# EAGLE board mainBoard_GTernal_1-1_v35 (EAGLE 9.7.0)
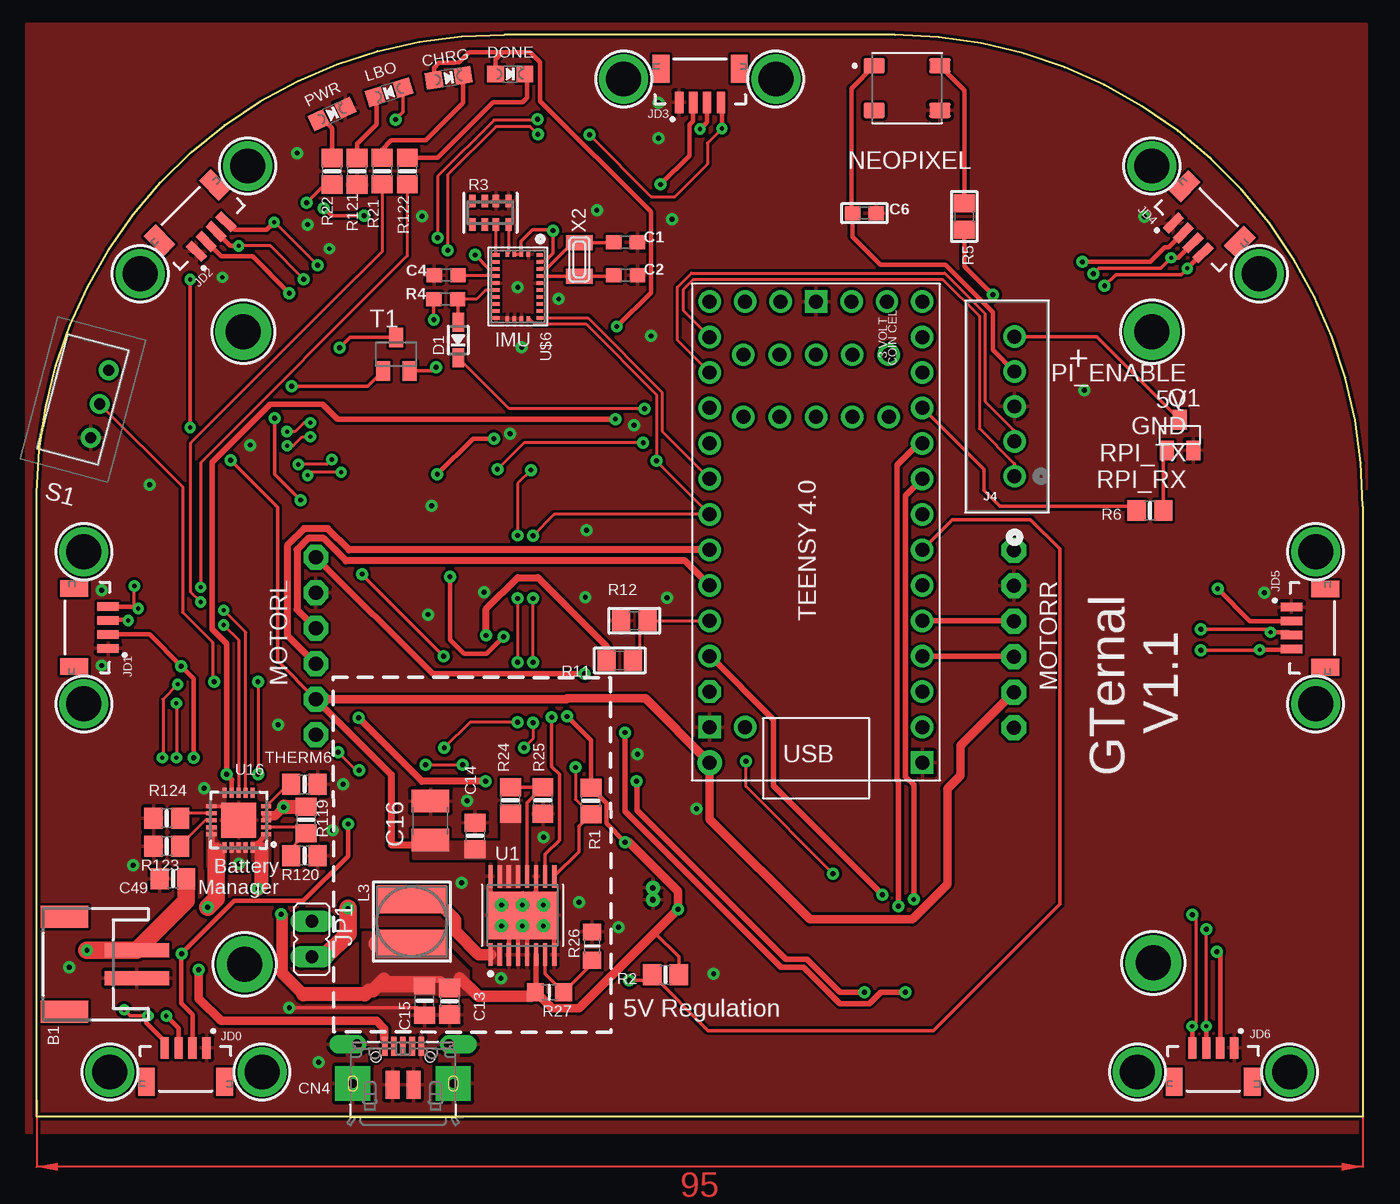
[diagram p0: board, top side]
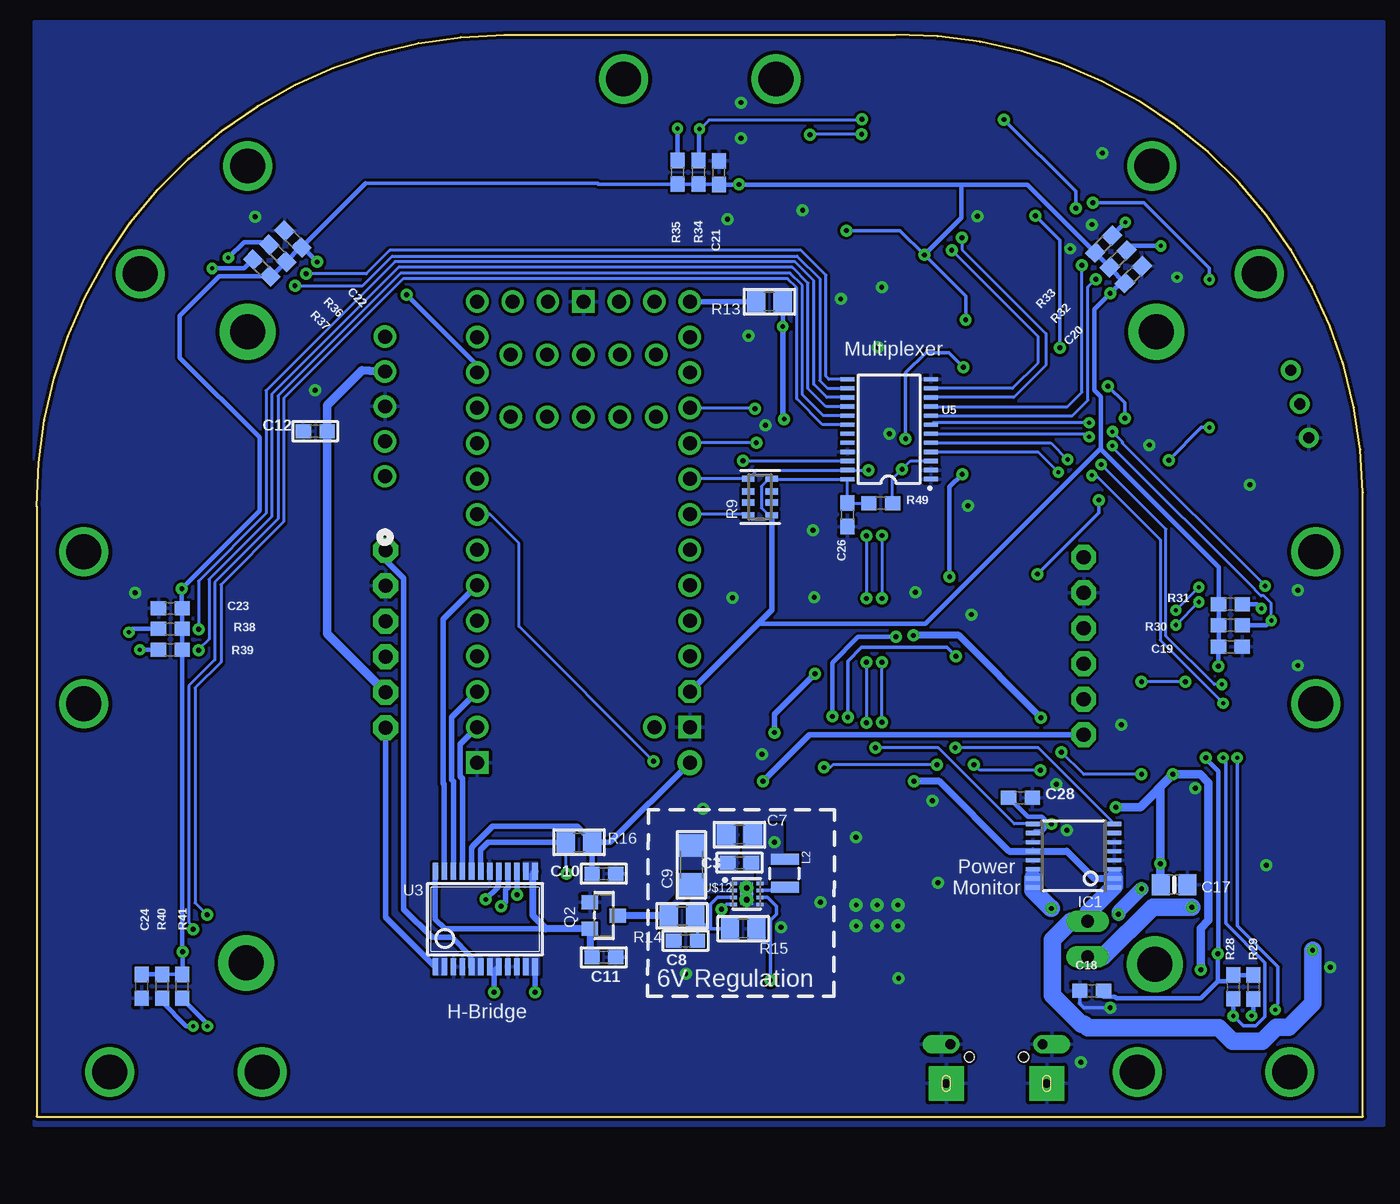
[diagram p1: board, bottom side, seen from below]

Size 95 x 77.46 mm. Coordinates in mm from the lower left corner, seen from the top.
Outline: 95,0 0,0 0,44.7 arc-90 33.5,77.46 61.5,77.46 arc-90 95,43.7 95,0
Copper layers (1*16): Top 0.035mm / dielectric 1.5mm / Bottom 0.035mm
Design rules "SparkFun *": minimum track width 8mil, minimum drill 0.3mm, track to track 8mil, track to pad 8mil, pad to pad 8mil, via to via 8mil, smd to smd 8mil, copper to edge 8mil, drill to drill 8mil, minimum pad ring 12mil, minimum via ring 10mil, stop-mask expansion 4mil, vias tented up to drill 20mil, thermal gap 10mil
Net classes: 1 highpower: width 0.406 mm, drill 0.483 mm

## Footprints (pad centres in the part's own frame; a part is rotated, then mirrored left to right if it is on the bottom)
JSTPH2 = smd 1 x 4.6: 1 -1,-3.7; 2 1,-3.7 | smd 1.6 x 3.4: NC1 -3.4,1.5; NC2 3.4,1.5
0603-NO = smd 1.1 x 1: 1 -0.85,0; 2 0.85,0
0603 = smd 1.1 x 1: 1 -0.85,0; 2 0.85,0
0805 = smd 1.3 x 1.5: 1 -0.95,0; 2 0.95,0
1206 = smd 1.6 x 1.8: 1 -1.4,0; 2 1.4,0
0805-NO = smd 1.3 x 1.5: 1 -0.95,0; 2 0.95,0
0805_10MGAP = smd 1.2 x 1.5: 1 -1.05,0; 2 1.05,0
C1210 = smd 1.6 x 2.7: 1 -1.4,0; 2 1.4,0
CHIPLED_0805_NOOUTLINE = smd 1.2 x 1.2: A 0,-1.05; C 0,1.05
4UCONN_20329 = smd 1 x 2: BASE@1 -0.75,-2; BASE@2 0.75,-2 | smd 0.4 x 1.35: D+ 0,0.775; D- -0.65,0.775; GND 1.3,0.775; ID 0.65,0.775; VBUS -1.3,0.775 | drill 0.7 offset: SPRT@1 -3.3,0.9; SPRT@2 3.3,0.9 | drill 0.6 pad 2.5 square: SPRT@3 -3.6,-1.9; SPRT@4 3.6,-1.9 | hole 0.7: -1.95,0; 1.95,0
SOD-323 = smd 1.35 x 0.8: A 1.27,0; C -1.27,0
TSSOP16 = smd 0.305 x 0.991: 1 -2.275,-2.918; 2 -1.625,-2.918; 3 -0.975,-2.918; 4 -0.325,-2.918; 5 0.325,-2.918; 6 0.975,-2.918; 7 1.625,-2.918; 8 2.275,-2.918; 9 2.275,2.918; 10 1.625,2.918; 11 0.975,2.918; 12 0.325,2.918; 13 -0.325,2.918; 14 -0.975,2.918; 15 -1.625,2.918; 16 -2.275,2.918
CONN_B5B-XH-A_JST = drill 0.991 pad 1.499: 1 0,0; 2 2.5,0; 3 5,0; 4 7.5,0; 5 10.001,0
JST04_1MM_VERT = smd 0.6 x 1.55: 1 -1.478,0.775; 2 -0.478,0.775; 3 0.522,0.775; 4 1.522,0.775 | smd 1.2 x 2: NC1 -2.778,3.2; NC2 2.822,3.2
JP1 = drill 0.914 long: 1 0,-1.27; 2 0,1.27
MURATA_DFE252012P-1R5M=P2 = smd 0.8 x 2: P$1 -1,0; P$2 1,0
INDUCTOR_5X5MM_TDK_VLC5045 = smd 2 x 5: P$1 -1.6,0; P$2 1.6,0
1X06-CLEANBIG = drill 1.016 pad 1.778 octagon: 1 -6.35,0; 2 -3.81,0; 3 -1.27,0; 4 1.27,0; 5 3.81,0; 6 6.35,0
SOL320P540X170-4N = smd 1.51 x 1.09: 1 -2.36,1.6; 2 -2.36,-1.6; 3 2.36,-1.6; 4 2.36,1.6
SOT23 = smd 1 x 1.4: 1 -0.95,-1.1; 2 0.95,-1.1; 3 0,1.1
SOT23-WIDE = smd 1 x 1.2: 1 -0.95,-1; 2 0.95,-1; 3 0,1
RESPACK_4X0603 = smd 0.45 x 0.9: 1 -1.3,-0.85; 2 -0.4,-0.85; 3 0.4,-0.85; 4 1.3,-0.85; 5 1.3,0.85; 6 0.4,0.85; 7 -0.4,0.85; 8 -1.3,0.85
_0805MP = smd 1.2 x 1.3: 1 -1.016,0; 2 1.016,0
MHSS1105 = drill 0.8 pad 1.3: 1 1.25,2.5; 2 1.25,0; 3 1.25,-2.5
SC59-BEC = smd 1 x 1.4: B -0.95,-1.2; C 0,1.2; E 0.95,-1.2
TEXAS_INSTRUMENTS_TPS61030PWP_0 = smd 0.3 x 1.6: 1 -2.275,-2.8; 2 -1.625,-2.8; 3 -0.975,-2.8; 4 -0.325,-2.8; 5 0.325,-2.8; 6 0.975,-2.8; 7 1.625,-2.8; 8 2.275,-2.8; 9 2.275,2.8; 10 1.625,2.8; 11 0.975,2.8; 12 0.325,2.8; 13 -0.325,2.8; 14 -0.975,2.8; 15 -1.625,2.8; 16 -2.275,2.8 | smd 5 x 3.4: 17 0,0 | drill 0.33 pad 0.63: PAD_1 -1.5,0.75; PAD_2 0,0.75; PAD_3 1.5,0.75; PAD_4 -1.5,-0.75; PAD_5 0,-0.75; PAD_6 1.5,-0.75
SSOP24 = smd 0.4 x 1.2: 1 -3.575,-3.42; 2 -2.925,-3.42; 3 -2.275,-3.42; 4 -1.625,-3.42; 5 -0.975,-3.42; 6 -0.325,-3.42; 7 0.325,-3.42; 8 0.975,-3.42; 9 1.625,-3.42; 10 2.275,-3.42; 11 2.925,-3.42; 12 3.575,-3.42; 13 3.575,3.42; 14 2.925,3.42; 15 2.275,3.42; 16 1.625,3.42; 17 0.975,3.42; 18 0.325,3.42; 19 -0.325,3.42; 20 -0.975,3.42; 21 -1.625,3.42; 22 -2.275,3.42; 23 -2.925,3.42; 24 -3.575,3.42
TSSOP28 = smd 1 x 0.3: 1 -3,3.57; 2 -3,2.925; 3 -3,2.275; 4 -3,1.625; 5 -3,0.975; 6 -3,0.325; 7 -3,-0.325; 8 -3,-0.975; 9 -3,-1.625; 10 -3,-2.275; 11 -3,-2.925; 12 -3,-3.575; 13 3,-3.575; 14 3,-2.925; 15 3,-2.275; 16 3,-1.625; 17 3,-0.975; 18 3,-0.325; 19 3,0.325; 20 3,0.975; 21 3,1.625; 22 3,2.275; 23 3,2.925; 24 3,3.575
QFN20_4MM = smd 0.73 x 0.28: P$1 -1.965,1; P$2 -1.965,0.5; P$3 -1.965,0; P$4 -1.965,-0.5; P$5 -1.965,-1; P$11 1.965,-1; P$12 1.965,-0.5; P$13 1.965,0; P$14 1.965,0.5; P$15 1.965,1 | smd 0.28 x 0.73: P$6 -1,-1.965; P$7 -0.5,-1.965; P$8 0,-1.965; P$9 0.5,-1.965; P$10 1,-1.965; P$16 1,1.965; P$17 0.5,1.965; P$18 0,1.965; P$19 -0.5,1.965; P$20 -1,1.965 | smd 2.5 x 2.5: P$21 0,0
BNO055 = smd 0.25 x 0.475: 1 -2.25,1.562; 6 -2.25,-1.562; 7 -1.75,-1.562; 8 -1.25,-1.562; 9 -0.75,-1.562; 10 -0.25,-1.562; 11 0.25,-1.562; 12 0.75,-1.562; 13 1.25,-1.562; 14 1.75,-1.562; 15 2.25,-1.562; 20 2.25,1.562; 21 1.75,1.562; 22 1.25,1.562; 23 0.75,1.562; 24 0.25,1.562; 25 -0.25,1.562; 26 -0.75,1.562; 27 -1.25,1.562; 28 -1.75,1.562 | smd 0.375 x 0.25: 2 -2.312,0.75; 3 -2.312,0.25; 4 -2.312,-0.25; 5 -2.312,-0.75; 16 2.312,-0.75; 17 2.312,-0.25; 18 2.312,0.25; 19 2.312,0.75
MOUNTINGHOLE_2.5_PLATED_THICK = drill 2.5 pad 4: P$1 0,0
MOUNTINGHOLE_2.5_PLATED = drill 2.5 pad 3.2: P$1 0,0
TPS61252 = smd 0.5 x 0.25: 1 -0.95,0.75; 2 -0.95,0.25; 3 -0.95,-0.25; 4 -0.95,-0.75; 5 0.95,-0.75; 6 0.95,-0.25; 7 0.95,0.25; 8 0.95,0.75 | drill 0.4 pad 0.457: P$2_GND 0,0.423; P$3_GND 0,-0.423 | smd 0.9 x 1.6: THERMAL_GND 0,0
TEENSY40 = drill 1: 0-RX1 -13.97,-7.62; 1-TX1 -11.43,-7.62; 2-OUT2 -8.89,-7.62; 3-LRCLK2 -6.35,-7.62; 3V3-2 16.51,-2.54; 4-BCLK2 -3.81,-7.62; 5-IN2 -1.27,-7.62; 6-OUT1D 1.27,-7.62; 7-RX2/OUT1A 3.81,-7.62; 8-TX2/IN1 6.35,-7.62; 9-OUT1C 8.89,-7.62; 10-CS/MQSR 11.43,-7.62; 11-MOSI/CTX1 13.97,-7.62; 12-MIO/MQSL 16.51,-7.62; 13-SCK/CRX1/LED 16.51,7.62; 14-A0/TX3/S-PFI_OUT 13.97,7.62; 15-A1/RX3/S-PDIF_IN 11.43,7.62; 16-A2/RX4/SCL1 8.89,7.62; 17-A3/TX4/SDA1 6.35,7.62; 18-A4/SDA0 3.81,7.62; 19-A5/SCL0 1.27,7.62; 20-A6/TX5/LRCLK1 -1.27,7.62; 21-A7/RX5/BCLK1 -3.81,7.62; 22-A8/CTX1 -6.35,7.62; 23-A9/CRX1/CCLK1 -8.89,7.62; 24-A10/TX6/SCL2 12.7,5.207; 25-A11/SDA2 8.255,5.207; 26-A12/MOSI1 12.7,2.603; 27-A13/SCK1 8.255,2.603; 28-RX7 12.7,0; 29-TX7 8.255,0; 30-CRX3 12.7,-2.603; 31-CTX3 8.255,-2.603; 32-OUTB1 12.7,-5.207; 33-MCLK2 8.255,-5.207; ON/OFF 16.51,5.08; PROGRAM 16.51,2.54; VBAT 16.51,-5.08; VUSB -13.97,5.08 | drill 1 octagon: 3V3-1 -11.43,7.62 | drill 1 square: GND1 -16.51,-7.62; GND2 16.51,0; GND3 -13.97,7.62 | drill 1 pad 1.778: VIN -16.51,7.62
XTAL3215 = smd 1.1 x 1.9: P$1 1.2,0; P$2 -1.2,0

## Placement (x,y rotation side)
B1  1.8-5V  [JSTPH2]  3.48,10.91 90 top
C1  22pF  [0603-NO]  42.19,62.61 180 top
C2  22pF  [0603-NO]  42.19,60.25 180 top
C3  10uF  [0603]  44.66,18.18 180 bottom
C4  0.1uF  [0603-NO]  29.33,60.26 0 top
C6  10uF  [0603]  59.3,64.7 0 top
C7  0.1uF  [0805]  44.66,20.18 180 bottom
C8  100pF  [0603]  48.51,12.59 0 bottom
C9  47uF  [1206]  48.1,18.02 90 bottom
C10  10uF  [0603]  54.37,17.39 0 bottom
C11  10uF  [0603]  54.37,11.39 0 bottom
C12  10uF  [0603]  75.05,49.08 0 bottom
C13  10uF  [0805-NO]  29.59,8.26 270 top
C14  2.2uF  [0805-NO]  31.41,20.1 90 top
C15  0.1uF  [0805_10MGAP]  27.78,8.3 270 top
C16  100uF  [C1210]  28.2,21.2 90 top
C17  10uF  [0805-NO]  13.52,16.61 0 bottom
C18  1.0uF  [0603]  19.42,9.01 180 bottom
C19  1.0uF  [0603]  9.49,33.64 0 bottom
C20  1.0uF  [0603]  16.44,60.29 45 bottom
C21  1.0uF  [0603]  46.13,67.59 90 bottom
C22  1.0uF  [0603]  76.63,62.84 135 bottom
C23  1.0uF  [0603]  85.43,36.39 180 bottom
C24  1.0uF  [0603]  87.49,9.32 270 bottom
C26  0.1uF  [0603]  36.92,43.09 270 bottom
C28  1uF  [0603-NO]  24.52,22.83 0 bottom
C49  10uF  [0805-NO]  9.77,17.04 180 top
CHRG  ORANGE  [CHIPLED_0805_NOOUTLINE]  29.51,74.39 279 top
CN4  microUSB_Charging_Coil_Input  [4UCONN_20329]  26.24,4.27 0 top
D1  1n4148  [SOD-323]  30.2,55.6 90 top
DONE  GREEN  [CHIPLED_0805_NOOUTLINE]  33.91,74.66 270 top
IC1  INA260  [TSSOP16]  20.72,18.68 90 bottom
J4  3A/250V  [CONN_B5B-XH-A_JST]  70.05,45.85 90 top
JD0  QWIIC_Vertical  [JST04_1MM_VERT]  10.69,5.69 180 top
JD1  QWIIC_Vertical  [JST04_1MM_VERT]  5.88,35 90 top
JD2  QWIIC_Vertical  [JST04_1MM_VERT]  13.03,62.46 45 top
JD3  QWIIC_Vertical  [JST04_1MM_VERT]  47.5,71.85 0 top
JD4  QWIIC_Vertical  [JST04_1MM_VERT]  81.93,62.39 315 top
JD5  QWIIC_Vertical  [JST04_1MM_VERT]  89.12,35 270 top
JD6  QWIIC_Vertical  [JST04_1MM_VERT]  84.31,5.69 180 top
JP1  [JP1]  19.71,12.71 180 top
L2  1.5uH  [MURATA_DFE252012P-1R5M=P2]  41.4,17.42 270 bottom
L3  6.8uH  [INDUCTOR_5X5MM_TDK_VLC5045]  26.88,13.96 90 top
LBO  RED  [CHIPLED_0805_NOOUTLINE]  25.25,73.35 108 top
MOTORL  [1X06-CLEANBIG]  20,33.7 90 top
MOTORR  [1X06-CLEANBIG]  70,34.2 90 top
NEOPIXEL  2758  [SOL320P540X170-4N]  62.35,73.65 0 top
PWR  BLUE  [CHIPLED_0805_NOOUTLINE]  21.16,71.8 295 top
Q1  MMBT2222A  [SOT23]  81.9,48.8 0 top
Q2  DMP2045U  [SOT23-WIDE]  54.37,14.39 270 bottom
R1  100K  [0805-NO]  39.7,22.6 270 top
R2  10K  [0805-NO]  45.05,10.15 180 top
R3  10K  [RESPACK_4X0603]  32.5,64.73 0 top
R4  10K  [0603-NO]  29.3,58.54 0 top
R5  300-500  [0805]  66.45,64.45 270 top
R6  100  [0805-NO]  79.75,43.4 180 top
R9  10K  [RESPACK_4X0603]  43.18,44.37 90 bottom
R11  5K  [0805]  41.77,32.66 180 top
R12  15K  [0805]  42.81,35.5 0 top
R13  5k  [0805]  42.51,58.35 180 bottom
R14  787K  [0805]  48.77,14.37 0 bottom
R15  196K  [0805]  44.39,13.45 0 bottom
R16  10k  [0805]  56.15,19.64 0 bottom
R21  1K  [0805-NO]  24.75,67.71 90 top
R22  1K  [0805-NO]  21.15,67.69 90 top
R24  1.87M  [0805-NO]  33.93,22.64 270 top
R25  200K  [0805-NO]  36.26,22.64 90 top
R26  340K  [_0805MP]  39.79,12.2 270 top
R27  1.87M  [_0805MP]  36.73,8.9 180 top
R28  4.7k  [0603]  9.29,9.28 270 bottom
R29  4.7k  [0603]  7.83,9.28 270 bottom
R30  4.7k  [0603]  9.48,35.17 0 bottom
R31  4.7k  [0603]  9.48,36.67 0 bottom
R32  4.7k  [0603]  17.53,61.42 45 bottom
R33  4.7k  [0603]  18.57,62.48 45 bottom
R34  4.7k  [0603]  47.59,67.63 90 bottom
R35  4.7k  [0603]  49.09,67.62 90 bottom
R36  4.7k  [0603]  77.73,61.82 135 bottom
R37  4.7k  [0603]  78.88,60.77 135 bottom
R38  4.7k  [0603]  85.43,34.92 180 bottom
R39  4.7k  [0603]  85.43,33.42 180 bottom
R40  4.7k  [0603]  86.03,9.32 270 bottom
R41  4.7k  [0603]  84.58,9.32 270 bottom
R49  10k  [0603]  34.53,43.93 180 bottom
R119  270K  [0805-NO]  19.3,21.24 90 top
R120  100K  [0805-NO]  19.18,18.69 0 top
R121  1K  [0805-NO]  22.95,67.69 90 top
R122  1K  [0805-NO]  26.55,67.7 90 top
R123  1.0K  [0805-NO]  9.32,19.36 0 top
R124  100K  [0805-NO]  9.32,21.37 0 top
S1  MHSS1105  [MHSS1105]  3.3,51.35 345 top
T1  MMUN2133LT1G  [SC59-BEC]  25.75,54.6 0 top
THERM6  15K  [0805-NO]  19.18,23.79 180 top
U1  TEXAS_INSTRUMENTS_TPS61030PWPTEXAS_INSTRUMENTS_TPS61030PWP_0_0  [TEXAS_INSTRUMENTS_TPS61030PWP_0]  34.8,14.4 0 top
U3  TB6612 SSOP  [SSOP24]  62.87,14.14 0 bottom
U5  PCA9548A  [TSSOP28]  33.93,49.22 180 bottom
U16  MCP73871  [QFN20_4MM]  14.48,21.23 180 top
U$6  BNO055  [BNO055]  34.47,59.44 270 top
U$7  [MOUNTINGHOLE_2.5_PLATED_THICK]  14.8,56.2 0 top
U$8  MOUNTINGHOLE2.5  [MOUNTINGHOLE_2.5_PLATED]  42.05,74.3 0 top
U$12  TPS61252SMD  [TPS61252]  44.14,15.95 0 bottom
U$23  [MOUNTINGHOLE_2.5_PLATED_THICK]  79.9,56.2 0 top
U$28  [MOUNTINGHOLE_2.5_PLATED_THICK]  14.9,10.9 0 top
U$29  [MOUNTINGHOLE_2.5_PLATED_THICK]  80,11 0 top
U$30  MOUNTINGHOLE2.5  [MOUNTINGHOLE_2.5_PLATED]  52.95,74.3 0 top
U$31  MOUNTINGHOLE2.5  [MOUNTINGHOLE_2.5_PLATED]  7.41,60.36 0 top
U$32  MOUNTINGHOLE2.5  [MOUNTINGHOLE_2.5_PLATED]  15.11,68.07 0 top
U$33  MOUNTINGHOLE2.5  [MOUNTINGHOLE_2.5_PLATED]  3.38,29.55 0 top
U$34  MOUNTINGHOLE2.5  [MOUNTINGHOLE_2.5_PLATED]  3.38,40.45 0 top
U$35  MOUNTINGHOLE2.5  [MOUNTINGHOLE_2.5_PLATED]  5.24,3.19 0 top
U$36  MOUNTINGHOLE2.5  [MOUNTINGHOLE_2.5_PLATED]  16.14,3.19 0 top
U$37  MOUNTINGHOLE2.5  [MOUNTINGHOLE_2.5_PLATED]  79.89,68.07 0 top
U$43  MOUNTINGHOLE2.5  [MOUNTINGHOLE_2.5_PLATED]  87.59,60.36 0 top
U$45  MOUNTINGHOLE2.5  [MOUNTINGHOLE_2.5_PLATED]  91.62,40.45 0 top
U$46  MOUNTINGHOLE2.5  [MOUNTINGHOLE_2.5_PLATED]  91.62,29.55 0 top
U$47  MOUNTINGHOLE2.5  [MOUNTINGHOLE_2.5_PLATED]  78.86,3.19 0 top
U$48  MOUNTINGHOLE2.5  [MOUNTINGHOLE_2.5_PLATED]  89.76,3.19 0 top
U$57  TEENSY40  [TEENSY40]  55.83,41.85 90 top
X2  32.768  [XTAL3215]  38.87,61.37 270 top

## Library data of the parts
B1 C1-C4 C6-C15 C17 C28 C49 CHRG CN4 D1 DONE IC1 L3 LBO PWR Q2 R1-R6 R9 R11-R16 R21 R22 R24-R27 R119-R124 THERM6 U3 U16 U$6 U$7 U$23 U$28 U$29 = microbuilder
C16 = rcl
C18-C24 = SparkFun-Capacitors; PROD_ID: CAP-00868
C26 = SparkFun-Capacitors; PROD_ID: CAP-00810
J4 = 2023-10-05_21-35-32_Library; COPYRIGHT: Copyright (C) 2023 Ultra Librarian. All rights reserved.; MANUFACTURER_PART_NUMBER: B5B-XH-A; MFR_NAME: JST
JD0 JD1-JD6 = SparkFun-Connectors; PROD_ID: CONN-14483
JP1 = jumper
L2 = gritsbotx_electronics
MOTORL MOTORR = adafruit
NEOPIXEL = 2758; AVAILABILITY: In Stock; CHECK_PRICES: https://www.snapeda.com/parts/2758/Adafruit+Industries+LLC/view-part/?ref=eda; DESCRIPTION: Addressable Lighting Neopixel 10 LED Discrete Serial (Shift Register) Red, Green, Blue, Neutral White (RGBW) 5.00mm L x 5.00mm W; MF: Adafruit Industries; MP: 2758; PACKAGE: SMD-4 Adafruit Industries; PRICE: None; SNAPEDA_LINK: https://www.snapeda.com/parts/2758/Adafruit+Industries+LLC/view-part/?ref=snap
Q1 = MMBT2222A; AVAILABILITY: In Stock; CHECK_PRICES: https://www.snapeda.com/parts/MMBT2222A/Diotec/view-part/?ref=eda; DESCRIPTION: Bipolar (BJT) Transistor NPN 40 V 600 mA 250MHz 250 mW Surface Mount SOT-23-3 (TO-236); MF: Diotec Semiconductor; MP: MMBT2222A; PACKAGE: SOT-23-3 Diotec; PRICE: None; SNAPEDA_LINK: https://www.snapeda.com/parts/MMBT2222A/Diotec/view-part/?ref=snap
R28-R41 = SparkFun-Resistors; PROD_ID: RES-07857
R49 = SparkFun-Resistors; PROD_ID: RES-00824
S1 = MHSS1105; DESCRIPTION: APEM - MHSS1105 - SLIDE SWITCH, SPDT, 0.3A, 6VDC, TH; HEIGHT: 4mm; MANUFACTURER_NAME: Apem; MANUFACTURER_PART_NUMBER: MHSS1105; MOUSER_PART_NUMBER: 642-MHSS1105; MOUSER_PRICE-STOCK: https://www.mouser.co.uk/ProductDetail/Apem/MHSS1105?qs=pNV45xh2Ia0pDJDMcFqmnQ%3D%3D
T1 = Transistor
U1 = Texas Instruments - TPS61030PWP; CENTROID_NOT_SPECIFIED: No; CURRENT_-_OUTPUT: 3.6A (Switch); DATASHEET: http://www.ti.com/lit/gpn/tps61030; DIGIKEY_DESCRIPTION: IC Boost Switching Regulator IC Positive Adjustable 1.8V 1 Output 3.6A (Switch) 16-TSSOP (0.173", 4.40mm Width) Exposed Pad; DIGIKEY_PART_NUMBER: 296-27006-5-ND; FREQUENCY_-_SWITCHING: 600kHz; FUNCTION: Step-Up; LEAD_FREE: yes; MF: Texas Instruments; MFG_PACKAGE_IDENT: PWP (R-PDSO-G16); MOUSER_PART_NUMBER: 595-TPS61030PWP; MPN: TPS61030PWP; OUTPUT_TYPE: Adjustable; PACKAGE: HTSSOP16; PREFIX: U; ROHS: yes; TEMPERATURE_RANGE_HIGH: +85°C; TEMPERATURE_RANGE_LOW: -40°C; VOLTAGE_-_INPUT_(MAX): 5.5V; VOLTAGE_-_INPUT_(MIN): 1.8V; VOLTAGE_-_OUTPUT_(MAX): 5.5V; VOLTAGE_-_OUTPUT_(MIN/FIXED): 1.8V
U5 = SparkFun-IC-Logic; PROD_ID: IC-13948
U$8 U$30-U$37 U$43 U$45-U$48 = microbuilder; BOM: EXCLUDE
U$12 = Gritsbot_Library
U$57 = teensy
X2 = adafruit2

## Nets
3.3V: C18.1 C19.1 C20.1 C21.1 C22.1 C23.1 C24.1 C26.1 C28.1 IC1.10 JD0.2 JD1.2 JD2.2 JD3.2 JD4.2 JD5.2 JD6.2 R4.1 R9.1 R9.4 R28.1 R29.1 R30.1 R31.1 R32.1 R33.1 R34.1 R35.1 R36.1 R37.1 R38.1 R39.1 R40.1 R41.1 R49.2 U5.24 U$6.3 U$6.4 U$6.8 U$6.28 U$57.3V3-1
5.0V: C6.1 C10.1 C12.2 C14.1 C16.1 J4.4 MOTORL.2 MOTORR.2 NEOPIXEL.1 R16.2 R22.1 R24.2 U1.13 U1.14 U1.15 U3.20 U$57.VIN
6.0V: C8.1 C9.1 Q2.3 R14.1 U$12.2
ALERT: IC1.7
CHG_5V: R13.2 U$57.13-SCK/CRX1/LED
ENABLE: R1.2 S1.2 U1.9
ENCAL: MOTORL.3 U$57.20-A6/TX5/LRCLK1
ENCAR: MOTORR.3 U$57.2-OUT2
ENCBL: MOTORL.4 U$57.21-A7/RX5/BCLK1
ENCBR: MOTORR.4 U$57.3-LRCLK2
GND: B1.1 C1.1 C2.1 C3.2 C4.1 C6.2 C7.2 C9.2 C10.2 C11.2 C12.1 C13.2 C14.2 C15.2 C16.2 C17.2 C18.2 C19.2 C20.2 C21.2 C22.2 C23.2 C24.2 C26.2 C28.2 C49.2 CN4.BASE@1 CN4.BASE@2 CN4.GND CN4.SPRT@1 CN4.SPRT@2 CN4.SPRT@3 CN4.SPRT@4 IC1.4 IC1.5 IC1.6 IC1.11 IC1.13 J4.3 JD0.1 JD1.1 JD2.1 JD3.1 JD4.1 JD5.1 JD6.1 MOTORL.5 MOTORR.5 NEOPIXEL.3 PWR.C Q1.2 Q2.1 R3.5 R3.6 R12.1 R15.2 R25.1 R26.1 R120.2 R121.1 R123.1 R124.1 S1.3 THERM6.1 U1.3 U1.4 U1.5 U1.8 U1.11 U1.16 U1.17 U1.PAD_1 U1.PAD_2 U1.PAD_3 U1.PAD_4 U1.PAD_5 U1.PAD_6 U3.3 U3.4 U3.9 U3.10 U3.18 U5.1 U5.2 U5.12 U5.21 U16.P$10 U16.P$11 U16.P$21 U$6.2 U$6.10 U$6.15 U$6.16 U$6.17 U$6.18 U$6.25 U$12.1 U$12.5 U$12.P$2_GND U$12.P$3_GND U$12.THERMAL_GND U$57.GND1 U$57.GND2 U$57.GND3
I2CMUX_!RST: R49.1 U5.3 U$57.17-A3/TX4/SDA1
IMU_NRESET_3V: D1.A R4.2 U$6.11
IMU_RESET: D1.C U$57.16-A2/RX4/SCL1
INT_3V: U$6.14
LMIN1: U3.17 U$57.7-RX2/OUT1A
LMIN2: U3.16 U$57.8-TX2/IN1
LMOUT+: MOTORL.1 U3.11 U3.12
LMOUT-: MOTORL.6 U3.7 U3.8
MOT_EN: R2.2 U$12.6 U$57.5-IN2
N$1: R24.1 R25.2 U1.12
N$2: LBO.A T1.C
N$3: C1.2 U$6.27 X2.P$2
N$4: C2.2 U$6.26 X2.P$1
N$5: C4.2 U$6.9
N$6: T1.B U1.10
N$7: Q1.1 R6.1
N$8: CHRG.C R21.2
N$10: J4.5 Q1.3
N$11: L2.P$2 U$12.7
N$12: C8.2 R14.2 R15.1 U$12.3
N$13: L3.P$2 U1.1 U1.2
N$14: R26.2 R27.1 U1.7
N$18: NEOPIXEL.4 R5.1
N$19: PWR.A R22.2
N$100: R119.1 R120.1 U16.P$2
N$101: R122.1 U16.P$7
N$102: R21.1 U16.P$8
N$103: R123.2 U16.P$13
N$104: THERM6.2 U16.P$5
N$105: DONE.C R122.2
N$106: LBO.C R121.2
N$107: R124.2 U16.P$12
NEOPIXEL: R5.2 U$57.10-CS/MQSR
PI_START: R6.2 U$57.9-OUT1C
PS0_3V: R3.3 U$6.6
PS1_3V: R3.4 U$6.5
PWML: U3.15 U$57.23-A9/CRX1/CCLK1
PWMR: U3.23 U$57.4-BCLK2
RMIN1: U3.21 U$57.0-RX1
RMIN2: U3.22 U$57.1-TX1
RMOUT+: MOTORR.1 U3.1 U3.2
RMOUT-: MOTORR.6 U3.5 U3.6
RPI_RX: J4.1 U$57.14-A0/TX3/S-PFI_OUT
RPI_TX: J4.2 U$57.15-A1/RX3/S-PDIF_IN
SCL0: JD0.4 R29.2 U5.5
SCL1: JD1.4 R31.2 U5.7
SCL2: JD2.4 R33.2 U5.9
SCL3: JD3.4 R35.2 U5.11
SCL4: JD4.4 R37.2 U5.14
SCL5: JD5.4 R39.2 U5.16
SCL6: JD6.4 R41.2 U5.18
SCL_MAIN: IC1.9 R9.8 U5.22 U$6.19 U$57.19-A5/SCL0
SDA0: JD0.3 R28.2 U5.4
SDA1: JD1.3 R30.2 U5.6
SDA2: JD2.3 R32.2 U5.8
SDA3: JD3.3 R34.2 U5.10
SDA4: JD4.3 R36.2 U5.13
SDA5: JD5.3 R38.2 U5.15
SDA6: JD6.3 R40.2 U5.17
SDA_MAIN: IC1.8 R9.5 U5.23 U$6.20 U$57.18-A4/SDA0
STBY: R16.1 U3.19 U$57.6-OUT1D
V_PWR: IC1.14 IC1.15 IC1.16 JP1.2 U16.P$14 U16.P$15 U16.P$16
VBAT: C3.1 C7.1 C13.1 C15.1 L2.P$1 L3.P$1 R1.1 R2.1 R27.2 T1.E U1.6 U16.P$1 U16.P$20 U$12.4 U$12.8
VBAT_IN: B1.2 C49.1 IC1.1 IC1.2 IC1.3 IC1.12 JP1.1 R11.2
VBAT_MEASURE: R11.1 R12.2 U$57.22-A8/CTX1
VBUS: C17.1 CHRG.A CN4.VBUS DONE.A R13.1 R119.2 U16.P$3 U16.P$4 U16.P$9 U16.P$17 U16.P$18 U16.P$19
VMOTOR: C11.1 Q2.2 U3.13 U3.14 U3.24

## Tracks (layer width: path | path; a pad name or v marks a point on that pad's centre or on a via)
3.3V  (via drill 0.35)
  Top 0.254: v28.45,57.05 R4.1 | v31.4,61.7 32.41,60.69 U$6.8 | U$6.4 U$6.3 34.72,62.68 35.54,63.5 36.95,63.5 v37,63.45 37,61.83 36.41,61.24 36.08,61.24 U$6.28
  Top 0.305: JD1.2 8.08,34.52 v10.35,32.25 11.25,31.35 v11.25,25.7 | JD0.2 11.17,7.3 10.37,8.1 10.37,11.63 10.35,11.65 | JD6.2 84.79,11.56 v84.55,11.8 | JD5.2 86.92,35.48 v84.6,37.8 | v22.3,20.95 22.3,18.65 19.09,15.44 14.14,15.44 10.35,11.65 | v10.38,11.65 10.35,11.65 | v18.1,58.95 15.46,61.59 13.22,61.59 JD2.2 | v44.7,66.75 46.76,68.81 46.76,71.03 47.02,71.29 JD3.2 | JD4.2 81.12,62.26 80.81,62.26 79.79,61.23 74.93,61.23 v74.9,61.2
  Bottom 0.203: R9.1 42.56,43.07 43.09,43.6 43.09,45.14 42.56,45.67 R9.4 42.31,45.65 U5.24 36.92,45.63 C26.1 36.91,43.93 R49.2
  Bottom 0.254: v37,63.45 33.15,63.45 v31.4,61.7 28.45,58.75 v28.45,57.05 | 47.45,66.78 47.45,66.77 R35.1 54.8,66.77 54.8,66.82 71.45,66.82 | R34.1 46.17,66.78 C21.1 | R41.1 R40.1 | 79.03,48.63 79.03,48.6
  Bottom 0.305: 28.75,66.74 24.04,66.74 R33.1 R32.1 18.13,60.78 C20.1 17.36,59.69 v18.1,58.95 19.23,57.81 19.23,52.02 18.77,51.56 18.77,47.87 18.79,47.84 | 71.45,66.82 C22.1 | C22.1 76.12,62.24 R36.1 78.18,60.17 R37.1 81.92,60.17 84.75,57.35 84.75,54.35 79.03,48.63 | R40.1 C24.1 | R28.1 9.28,10.12 | 9.28,10.12 R29.1 | v31.4,61.7 28.75,64.35 28.75,66.74 | v74.9,61.2 75.94,62.24 C22.1 | R41.1 84.55,10.2 v84.55,11.8 84.58,11.83 R39.1 R38.1 C23.1 84.6,36.41 v84.6,37.8 79.03,43.37 79.03,48.6 | 10.38,9.7 v10.38,11.65 10.35,11.65 10.35,24.74 11.25,25.64 v11.25,25.7 | v10.35,32.25 10.34,32.26 C19.1 R30.1 R31.1 10.33,39.35 18.76,47.78 18.76,47.81 18.79,47.84 | C21.1 v44.71,66.74 v44.7,66.75 v44.69,66.74 28.75,66.74 | 47.45,66.78 R34.1 | 22.79,20.95 22.79,20.65 23,20.44 23.5,20.44 IC1.10 | 22.79,20.95 22.79,21.25 23,21.46 24,21.46 C28.1 | 22.79,20.95 v22.3,20.95 | 43.33,35.3 31.33,35.3 18.79,47.84 | 10.38,9.7 9.7,9.7 9.28,10.12 | 10.38,9.7 11.6,8.48 17.67,8.48 17.77,8.59 18.57,8.59 C18.1
  Bottom 0.406: R9.1 42.33,36.3 43.33,35.3 U$57.3V3-1
5.0V  (via drill 0.3, 0.35)
  Top 0.254: MOTORL.2 17.25,32.64 17.25,43.65 v13.9,47 | v11,59.95 v11,49.35 | v19.35,65.45 20.64,66.74 R22.1
  Top 0.305: NEOPIXEL.1 58.35,73.61 58.35,64.8 C6.1 58.45,63 60.45,61 65.1,61 68.5,57.6 68.5,54.9 J4.4
  Top 0.508: MOTORL.2 25.4,24.49 25.4,19.45 28.07,19.45
  Top 0.61: MOTORL.2 37.96,29.89 38.01,29.94 43.61,29.94 U$57.VIN 48.21,21.29 55.39,14.12 62.72,14.12 65.23,16.62 65.23,23.46 66.16,24.4 66.16,26.55 MOTORR.2
  Bottom 0.254: v13.9,47 11.55,49.35 v11,49.35 | v11,59.95 11,60.75 15.7,65.45 v19.35,65.45
  Bottom 0.381: C10.1 55.22,19.62 R16.2 56.05,20.5 56.05,20.55 56.29,20.78 62.35,20.78 63.78,19.36 63.78,19.32 63.85,19.25 U3.20
  Bottom 0.406: U$57.VIN 53.91,19.64 R16.2
  Bottom 0.61: MOTORR.2 74.2,34.59 C12.2 74.2,50.95 71.7,53.45 J4.4
  pour Top (no thermals): 26.95,20.5 26.95,18.5 33.02,18.5 33.06,18.49 33.09,18.46 33.1,18.42 33.1,16.45 34.6,16.45 34.6,22.25 33.3,22.25 33.3,19.73 33.29,19.69 33.26,19.66 33.22,19.65 29.53,19.65 29.49,19.66 29.46,19.69 29.45,19.73 29.45,20.5
6.0V
  Bottom 0.508: R14.1 53.34,14.37 Q2.3
  pour Bottom (no thermals): 49.15,13.62 49.14,13.59 48.9,13.35 48.9,12.08 49.91,12.08 49.91,13.08 49.92,13.11 50.29,13.48 50.29,15.13 49.67,15.13 49.65,15.14 49.03,15.75 49.02,15.78 49.02,17.42 47.24,17.42 47.24,16.33 47.23,16.31 47.21,16.28 47.18,16.27 44.83,16.27 44.83,16.02 47.18,16.02 47.21,16.01 47.23,15.99 47.24,15.96 47.24,15.77 48.37,15.77 48.4,15.75 49.14,15.01 49.15,14.99
CHG_5V
  Bottom 0.406: U$57.13-SCK/CRX1/LED R13.2
ENABLE  (via drill 0.35)
  Top 0.203: S1.2 10.45,45.09 10.45,36.1 12.6,33.95 12.6,31.2 12.65,31.15 v12.7,31.15 | v15.85,31.15 v15.85,24.5 | v21.6,26.1 22.9,24.8 v23.1,24.8 | v27.85,25.2 v30.5,25.2 | v38.6,25 v38.59,25 38.59,22.7 39.65,21.65 R1.2
  Top 0.254: U1.9 38.85,18.98 38.85,20.8 R1.2
  Bottom 0.203: v12.7,31.15 v15.85,31.15 | v15.85,24.5 20,24.5 v21.6,26.1 | v23.1,24.8 27.45,24.8 v27.85,25.2 | v30.5,25.2 37.95,25.2 38.15,25 v38.6,25
ENCAL
  Top 0.508: MOTORL.3 19.99,32.43 17.94,34.47 17.94,40.9 19.15,42.11 20.85,42.11 22.38,40.58 U$57.20-A6/TX5/LRCLK1
ENCAR
  Top 0.406: U$57.2-OUT2 69.97,32.96 MOTORR.3
ENCBL
  Top 0.508: MOTORL.4 19.99,34.97 18.65,36.3 18.65,40.61 19.44,41.4 20.56,41.4 22.15,39.8 46.45,39.8 U$57.21-A7/RX5/BCLK1
ENCBR
  Top 0.406: U$57.3-LRCLK2 69.97,35.5 MOTORR.4
GND  (via drill 0.3, 0.35)
  Top 0.254: U16.P$11 13.48,22.23 U16.P$21 | v18.1,7.8 v18.11,7.8 27.23,7.8 C15.2
  Top 0.305: U1.11 35.77,16.12 U1.PAD_2 | U1.16 32.52,15.93 U1.PAD_1 | U1.4 34.48,13.32 U1.PAD_5 35.12,13.32 U1.5 | U1.3 33.83,13.12 U1.PAD_4 | U1.8 37.08,12.88 U1.PAD_6
  Bottom 0.254: v18.1,7.8 20,7.8 20.27,8.07 C18.2
  other vias: 30.82,22.6 43.05,25.95 21.2,20.5 34.46,59.4 40.13,64.91 15.28,48.09 6.92,18 19.42,63.88 27.62,64.48 33.9,48.9 28.3,43.75 39.4,42 39.3,37.2 45.15,37.15 32.05,37.55 28.05,35.95 4.65,37.7 4.65,32.3 18.65,69 79.36,64.44 87.95,37.5 44.55,70.05 45.5,64.25 44,55.9 37.4,58.55 34.75,55.1 42.8,49.5 21.95,23.8 13.3,60.1 17.3,28.06 48.5,10.23 20.2,3.9 33.25,9.9 8.1,45.25 38.85,15.35 30.45,16.75 36.3,20 44.55,72.62 75.06,52 41.69,13.56 47.27,22.03 2.33,10.7 11.99,23.51 20.97,62.15
  pour Top (rank 4): -0.7,-1.13 95.24,-1.13 95.24,78.24 -0.7,78.24
  pour Bottom (rank 4): -1.49,-0.62 95.19,-0.62 95.19,78.39 -1.49,78.39
  pour Bottom (no thermals): 42.91,15.12 42.43,14.63 42.4,14.62 41.4,14.62 41.4,12.34 43.94,12.34 43.94,15.07 43.95,15.1 43.98,15.12 44,15.13 44.45,15.13 44.45,16.59 44.46,16.62 44.48,16.64 44.51,16.65 46.83,16.65 46.83,18.26 46.84,18.29 46.87,18.31 46.89,18.32 49.28,18.32 49.28,22.24 44.7,22.24 44.82,22.13 44.83,22.1 44.83,17.39 44.82,17.36 44.8,17.34 44.77,17.33 43.77,17.33 43.77,15.32 43.75,15.29 43.73,15.27 43.7,15.26 42.93,15.26 42.93,15.15
  pour Top (no thermals): 11.4,22.25 13.4,22.25 13.4,23.75 11.4,23.75
I2CMUX_!RST  (via drill 0.35)
  Top 0.203: v33,46.35 34.9,48.25 v43.45,48.25
  Bottom 0.203: R49.1 33.68,45.67 v33,46.35 32.4,46.95 U5.3 | v43.45,48.25 48.16,48.25 U$57.17-A3/TX4/SDA1
IMU_NRESET_3V
  Top 0.203: R4.2 31.5,58.54 32.15,59.19 U$6.11
  Top 0.254: R4.2 30.2,58.48 D1.A
IMU_RESET  (via drill 0.35)
  Top 0.203: v43.55,50.7 33.83,50.7 D1.C
  Bottom 0.203: U$57.16-A2/RX4/SCL1 43.59,50.74 v43.55,50.7
LMIN1  (via drill 0.35)
  Top 0.381: 62.25,43.97 62.25,24.33 62.83,23.75 v62.83,15.55
  Top 0.406: 62.25,43.97 62.25,44.47 U$57.7-RX2/OUT1A
  Bottom 0.381: U3.17 61.9,16.56 61.99,16.48 61.99,16.39 v62.83,15.55
LMIN2  (via drill 0.35)
  Top 0.381: 61.62,46.63 61.62,24.13 61.72,24.03 v61.72,15.05
  Top 0.406: 61.62,46.63 63.2,48.2 U$57.8-TX2/IN1
  Bottom 0.381: U3.16 61.25,16.39 61.4,16.23 61.4,15.37 v61.72,15.05
LMOUT+  (via drill 0.35)
  Top 0.381: v42.97,24.02 42.99,24 42.99,21.94 53.67,11.27 55.17,11.27 57.53,8.91 v59.31,8.91
  Bottom 0.381: v59.31,8.91 59.31,10.71 U3.12
  Bottom 0.406: v42.97,24.02 39.64,27.35 MOTORL.1
  pour Bottom (no thermals): 59.05,10.18 60.07,10.18 60.07,11.32 59.05,11.32
LMOUT-  (via drill 0.35)
  Top 0.381: v62.23,8.91 60.47,8.91 59.65,8.08 57.53,8.08 54.93,10.68 53.32,10.68 42.15,21.85 v42.15,27.5 | v42.15,27.5 | MOTORL.6 28.35,31.7 v39.25,31.7
  Bottom 0.381: U3.8 62.23,10.39 v62.23,8.91 | v42.15,27.5 42.15,28.8 v39.25,31.7
  pour Bottom (no thermals): 61.85,10.18 62.61,10.18 62.61,11.32 61.85,11.32
MOT_EN  (via drill 0.35)
  Top 0.203: 43.7,9.75 R2.2
  Top 0.254: v42.45,9.75 43.7,9.75 | U$57.5-IN2 65.62,42.75 71.2,42.75 73.3,40.65 73.3,15.2 64.25,6.15 48.1,6.15 R2.2
  Bottom 0.254: v42.45,9.75 42.45,14.05 42,14.5 42,15.05 42.65,15.7 U$12.6
N$1
  Top 0.254: U1.12 35.12,22.46 R25.2 R24.1
N$2  (via drill 0.35)
  Top 0.254: T1.C 22.45,55.8 v21.7,55.05 | v23.45,64.5 21.1,64.5 v20.55,65.05 | v25.7,71.4 26.25,71.95 LBO.A
  Bottom 0.254: v21.7,55.05 21.7,62.75 v23.45,64.5 | v20.55,65.05 20.55,66.25 v25.7,71.4
N$3
  Top 0.254: U$6.27 36.08,60.73 36.55,60.73 38.39,62.57 X2.P$2 41.3,62.57 C1.2
N$4
  Top 0.254: U$6.26 38.85,60.19 X2.P$1 41.26,60.17 C2.2
N$5
  Top 0.203: C4.2 32.23,60.26 32.84,60.26 U$6.9
N$6  (via drill 0.35)
  Top 0.254: U1.10 36.42,18.77 37.45,19.8 37.45,24.5 36.9,25.05 v36.9,28.6 | v29.15,32.95 23.3,38.8 v23.3,38.85 | v18.9,44.15 17.05,46 v17.05,50 | v18.25,52.3 23.7,52.3 T1.B
  Bottom 0.254: v36.9,28.6 36.9,32.6 35.9,33.6 29.8,33.6 v29.15,32.95 | v23.3,38.85 18.9,43.25 v18.9,44.15 | v17.05,50 17.05,51.1 v18.25,52.3
N$7
  Top 0.254: R6.1 80.7,47.45 Q1.1
N$8
  Top 0.305: CHRG.C 30.55,72.6 27.85,69.9 25.4,69.9 24.75,69.25 R21.2
N$10
  Top 0.254: Q1.3 75.95,55.85 J4.5
N$11
  Bottom 0.254: L2.P$2 41.62,16.2 U$12.7
N$12
  Bottom 0.254: C8.2 47.66,14.21 R14.2 46.9,13.45 46.74,13.45 | 46.74,13.45 R15.1 | U$12.3 46.22,15.7 46.74,15.19 46.74,13.45
N$13
  Top 0.813: L3.P$2 28.54,15.56 30,14.1 30,13.27 31.67,11.6 U1.1
  pour Top (no thermals): 32.58,11.03 33.12,11.03 33.12,12.17 32.58,12.17
N$14
  Top 0.254: R26.2 39.79,10.95 R27.1 36.42,10.22 U1.7
N$18
  Top 0.305: NEOPIXEL.4 66.45,73.51 R5.1
N$19
  Top 0.305: R22.2 21.15,70.77 20.77,71.16 20.26,71.16 20.21,71.21 PWR.A
N$100
  Top 0.203: R120.1 18.23,19.21 R119.1 18.87,20.73 U16.P$2
N$101  (via drill 0.3)
  Top 0.203: U16.P$7 14.98,34.67 v13.4,36.25 | R122.1 26.55,61.64 11.75,46.84 v11.75,37.9
  Bottom 0.203: v11.75,37.9 v13.4,36.25
N$102  (via drill 0.3)
  Top 0.203: U16.P$8 14.5,23.21 14.5,34.1 v13.4,35.2 | v11.75,36.85 11.04,37.56 11.04,48.24 22.93,60.12 22.95,60.15 24.75,61.95 R21.1
  Bottom 0.203: v11.75,36.85 v13.4,35.2
N$103
  Top 0.203: U16.P$13 12.08,21.23 10.27,19.42 R123.2
N$104
  Top 0.203: U16.P$5 18.01,23.79 THERM6.2
N$105
  Top 0.305: R122.2 28.72,68.66 32.71,72.64 34.8,72.64 35.12,72.96 35.12,74.24 DONE.C
N$106
  Top 0.305: R121.2 22.95,69.65 24.35,71.05 24.35,72.93 LBO.C
N$107
  Top 0.203: U16.P$12 10.63,21.73 R124.2
NEOPIXEL  (via drill 0.35)
  Top 0.305: v68.5,58.85 66.45,60.9 R5.2
  Bottom 0.305: v68.5,58.85 63.45,53.8 U$57.10-CS/MQSR
PI_START
  Top 0.254: U$57.9-OUT1C 67.85,46.34 67.85,44.85 69,43.7 78.5,43.7 R6.2
PS0_3V
  Top 0.203: U$6.6 R3.3
PS1_3V
  Top 0.203: R3.4 33.8,62.08 33.79,62.06 33.79,61.82 U$6.5
PWML  (via drill 0.35)
  Top 0.381: v60.58,15.89 52.8,23.67 52.8,28.43
  Top 0.406: 52.8,28.43 48.27,32.96 U$57.23-A9/CRX1/CCLK1
  Bottom 0.381: U3.15 60.6,15.91 v60.58,15.89
PWMR
  Bottom 0.381: U3.23 65.8,23.3
  Bottom 0.406: 65.8,23.3 65.8,23.78 65.88,23.87 65.88,35.61 U$57.4-BCLK2
RMIN1
  Bottom 0.381: U3.21 64.5,24.18
  Bottom 0.406: 64.5,24.18 64.5,24.21 64.66,24.37 64.66,26.67 U$57.0-RX1
RMIN2
  Bottom 0.381: U3.22 65.15,23.48
  Bottom 0.406: 65.15,23.48 65.15,24 65.27,24.12 65.27,28.6 U$57.1-TX1
RMOUT+
  Bottom 0.406: MOTORR.1 70,14.27 U3.1
  pour Bottom (no thermals): 65.66,10.18 66.55,10.18 66.55,11.32 65.66,11.32
RMOUT-
  Bottom 0.381: U3.5 63.9,10.78 63.9,11.48 65.25,12.83 66.69,12.83 68.72,14.86 68.72,38.54 70,39.82 MOTORR.6
  pour Bottom (no thermals): 63.12,10.18 63.88,10.18 63.88,11.32 63.12,11.32
RPI_RX
  Top 0.203: U$57.14-A0/TX3/S-PFI_OUT 48.21,55.84 46.35,57.7 46.35,59.25 47.05,59.95 64.9,59.95 67.52,57.33 67.52,49.28 70.05,46.75
  Top 0.254: 70.05,46.75 J4.1
RPI_TX
  Top 0.203: U$57.15-A1/RX3/S-PDIF_IN 45.9,55.59 45.9,59.4 46.9,60.4 65.05,60.4 67.94,57.51 67.94,51.21 70.03,49.12
  Top 0.254: 70.03,49.12 J4.2
SCL0  (via drill 0.3)
  Top 0.203: v21.15,47.05 20.8,46.7 v18.75,46.7 | 7.83,7.2 7.83,7.19 | v10.1,30.95 9.05,29.9 9.05,25.75 v9,25.7
  Top 0.254: 7.83,7.2 6.71,7.2 v6.27,7.64
  Top 0.305: JD0.4 9.17,5.39 7.83,6.72 7.83,7.19 7.86,7.22 v7.96,7.22
  Bottom 0.203: U5.5 22.35,48.25 v21.15,47.05 | v10.1,30.95 10.65,30.95 14.11,34.41 14.11,42.06 v18.75,46.7
  Bottom 0.254: v9,25.7 9,13.67 6.08,10.74 6.08,8.06 6.27,7.87 v6.27,7.64
  Bottom 0.305: R29.2 7.83,7.35 v7.96,7.22
SCL1  (via drill 0.3)
  Top 0.203: 7,36.52 v7,38 | v19.6,49.69 19.59,49.7 19.15,49.7 18.5,49.05 v17.93,49.05
  Top 0.305: JD1.4 7,36.52 7.05,36.52 7.18,36.39 v7.27,36.39
  Bottom 0.203: v19.6,49.69 v19.61,49.7 30.78,49.7 U5.7 | v7,38 17.23,48.23 17.23,48.33 17.93,49.03 v17.93,49.05
  Bottom 0.305: R31.2 7.56,36.67 v7.27,36.39
SCL2  (via drill 0.3, 0.35)
  Top 0.203: v20.12,60.98 17.06,64.04 v17.01,64.04
  Top 0.305: JD2.4 | v17.01,64.04 16.46,63.5 14.14,63.5 JD2.4
  Bottom 0.203: U5.9 21.15,50.85 20.12,51.88 v20.12,60.98
  Bottom 0.305: R33.2 v17.01,64.04
SCL3  (via drill 0.3, 0.35)
  Top 0.203: v29.45,62.05 29.45,67.45 32.9,70.9 35.35,70.9 v35.9,70.35 | v39.6,70.3 44.05,65.85 45.7,65.85 48.05,68.2 48.05,69.72 v49.09,70.75
  Top 0.305: JD3.4 49.09,72.56 v49.09,70.75
  Bottom 0.203: U5.11 25.1,52.15 23.25,53.99 23.25,55.85 v29.45,62.05 | v35.9,70.35 39.55,70.35 v39.6,70.3
  Bottom 0.305: v49.09,70.75 R35.2
SCL4  (via drill 0.3, 0.35)
  Top 0.254: v76.5,59.5 77.29,60.29 81.99,60.29 v82.43,60.73
  Top 0.305: JD4.4 v82.43,60.74 v82.43,60.73 | JD4.4
  Bottom 0.203: U5.14 38.35,52.15 38.9,52.7 38.9,60 40.53,61.63 69.52,61.63 71.65,59.5 v76.5,59.5
  Bottom 0.305: v82.43,60.74 80.12,60.74 R37.2
SCL5  (via drill 0.3, 0.35)
  Top 0.203: 87.59,33.4 v87.61,33.42
  Top 0.254: v83.4,33.4 87.59,33.4
  Top 0.305: JD5.4 89.84,33.42 v87.61,33.42
  Bottom 0.203: U5.16 38.45,50.85 39.74,52.14 39.74,59.69 40.86,60.81 69.09,60.81 78.16,51.74 78.16,42.97 82.66,38.47 82.66,34.19 83.4,33.45 v83.4,33.4
  Bottom 0.305: v87.61,33.42 R39.2
SCL6  (via drill 0.3, 0.35)
  Top 0.203: v82.8,14.45 83.05,14.2 83.05,6.73 v82.79,6.47 v82.78,6.47 | v82.78,6.47
  Top 0.305: v82.79,6.47 JD6.4
  Bottom 0.203: U5.18 38.7,49.55 40.55,51.4 40.55,59.35 41.2,60 68.75,60 77.3,51.45 77.3,42.6 81.8,38.1 81.8,32.55 83.65,30.7 83.65,15.3 v82.8,14.45
  Bottom 0.305: R41.2 84.58,8.42 82.79,6.64 82.79,6.48 v82.78,6.47
SCL_MAIN  (via drill 0.35)
  Top 0.203: U$6.19 35.3,57.13 35.67,56.76 39.34,56.76 44.4,51.7 v44.4,46.95 44.4,46.94 U$57.19-A5/SCL0 37.07,43.12 v35.55,41.6 | v35.55,28.2 35.55,27.05 v34.9,26.4 | v35.55,32.52 v35.55,37.1
  Bottom 0.203: U$57.19-A5/SCL0 44.09,43.12 R9.8 | v44.4,46.95 U5.22 | v34.9,26.4 30.42,26.4 24.97,20.95 IC1.9 | v35.55,41.6 v35.55,37.1 | v35.55,32.52 v35.55,28.2
SDA0  (via drill 0.3)
  Top 0.203: v10,29.6 10.01,29.59 v10.01,25.7 | v21.81,46.14 19.64,46.14 v19.41,45.92
  Top 0.305: v9.29,7.2 10.17,6.32 JD0.3
  Bottom 0.203: U5.4 23.26,47.6 v21.81,46.14 | v10,29.6 14.52,34.12 14.52,41.3 19.13,45.92 v19.41,45.92
  Bottom 0.254: v9.29,7.2 8.57,6.48 7.66,6.48 7,7.14 7,11.03 9.82,13.84 9.82,25.5 v10.01,25.7
  Bottom 0.305: R28.2 v9.29,7.2
SDA1  (via drill 0.3)
  Top 0.203: v19.6,48.67 19.02,48.67 18.39,48.04 v17.94,48.04
  Top 0.305: v6.56,35.52 6.51,35.57 5.16,35.57 JD1.3
  Bottom 0.203: v6.56,35.52 6.56,36.77 7.08,37.29 7.29,37.29 7.71,37.71 17.94,47.94 v17.94,48.04 | U5.6 19.82,48.9 v19.6,48.67
  Bottom 0.305: R30.2 6.91,35.17 v6.56,35.52
SDA2  (via drill 0.3, 0.35)
  Top 0.203: v19.12,59.98 16.75,62.35 v14.48,62.35
  Top 0.305: v14.48,62.35 14.46,62.37 13.85,62.37 12.85,63.36 JD2.3
  Bottom 0.203: U5.8 20.8,50.2 19.69,51.31 19.69,59.41 v19.12,59.98
  Bottom 0.305: R32.2 16.6,62.35 v14.48,62.35
SDA3  (via drill 0.3, 0.35)
  Top 0.203: v35.88,71.41 35.81,71.35 32.75,71.35 28.73,67.33 28.73,62.93 v28.72,62.92
  Top 0.305: JD3.3 48.02,71.22 v47.52,70.72
  Bottom 0.203: U5.10 25,51.5 22.69,53.81 22.69,56.07 28.72,62.09 v28.72,62.92 | v35.88,71.41 35.94,71.35 46.84,71.35 47.47,70.72 v47.52,70.72
  Bottom 0.305: v47.52,70.72 47.54,70.73 47.54,68.53 R34.2
SDA4  (via drill 0.3, 0.35)
  Top 0.254: v75.7,60.35 76.1,60.75 80.53,60.75 v81.27,61.5
  Top 0.305: JD4.3 82.85,62.56 81.79,61.5 v81.27,61.5
  Bottom 0.203: U5.13 38.25,52.8 38.45,53 38.45,60.25 40.23,62.03 69.72,62.03 71.4,60.35 v75.7,60.35
  Bottom 0.305: v81.27,61.5 80.15,62.62 78.54,62.62 R36.2
SDA5  (via drill 0.3, 0.35)
  Top 0.254: v83.4,34.9 88.17,34.9 v88.39,34.68
  Top 0.305: JD5.3 89.69,34.68 v88.39,34.68
  Bottom 0.203: U5.15 38.4,51.5 39.33,52.43 39.33,59.85 40.7,61.22 69.33,61.22 78.56,51.99 78.56,43.19 83.4,38.35 v83.4,34.9
  Bottom 0.305: v88.39,34.68 88.14,34.92 R38.2
SDA6  (via drill 0.3, 0.35)
  Top 0.203: v83.79,6.47 83.79,13.21 v83.79,13.4
  Top 0.305: JD6.3 v83.79,6.47
  Bottom 0.203: U5.17 38.65,50.2 40.14,51.69 40.14,59.52 41.03,60.41 68.92,60.41 77.71,51.62 77.71,42.79 82.25,38.25 82.25,32.7 84.1,30.85 84.1,13.9 83.79,13.59 v83.79,13.4
  Bottom 0.305: R40.2 86.03,8.21 84.29,6.47 v83.79,6.47
SDA_MAIN  (via drill 0.35)
  Top 0.203: U$57.18-A4/SDA0 48.21,45.69 44.81,49.09 44.81,51.87 39.48,57.19 U$6.20 | v35.4,46.3 34.45,45.35 v34.45,41.61 | v34.45,28.25 31.05,28.25 v29.2,26.4 | v34.45,37.1 v34.45,32.52
  Bottom 0.203: U$57.18-A4/SDA0 R9.5 43.4,46.3 U5.23 v35.4,46.3 | IC1.8 23.25,26.4 v29.2,26.4 | v34.45,41.61 v34.45,37.1 | v34.45,28.25 v34.45,32.52
STBY  (via drill 0.35)
  Top 0.203: v57.05,17.4 50.8,23.65 v50.8,25.45
  Bottom 0.203: R16.1 57.1,17.45 v57.05,17.4 | v50.8,25.45 60.45,35.1 60.45,41.05 62.52,43.12 U$57.6-OUT1D
  Bottom 0.381: R16.1 62.67,19.64 63.2,19.11 U3.19
V_PWR  (via drill 0.35)
  Top 0.305: U16.P$14 U16.P$15
  Top 0.508: U16.P$15 12.51,19.34 12.85,19
  Top 1.27: v12.25,15 12.85,15.6 12.85,16.65 12.85,19 | JP1.2 20.64,11.44 22.3,13.1 v22.3,14.9
  Bottom 1.27: JP1.2 18.61,11.44 15.05,15 v12.25,15 | v22.3,14.9 22.34,14.9 23.64,16.2 IC1.15
  pour Top (no thermals): 13.18,19.55 13.14,19.56 12.86,19.84 12.85,19.88 12.85,20.8 12.2,20.8 12.2,17.95 13.5,17.95 13.5,19.55
  pour Bottom (no thermals): 23.25,16.4 24,16.4 24,17.7 23.25,17.7
VBAT  (via drill 0.35)
  Top 0.254: 44.27,13.18 46,11.45 R2.1 | v28.6,53.65 28.35,53.4 T1.E
  Top 0.305: v42.15,19.65 40.81,20.99 40.81,22.45 40.6,22.66 40.59,22.66 R1.1 39.7,26.95 v38,28.65 | U16.P$20 15.84,19.62 15.88,19.62 16.08,19.83 16.08,19.87 U16.P$1 | v29.6,38.65 29.6,34.15 30.6,33.15 32.24,33.15 v33.45,34.36 | v28.7,46 31.25,48.55 v32.75,48.55
  Top 0.406: U1.6 35.78,8.9
  Top 0.508: 24.86,9.8 28.99,9.8 C13.1
  Top 0.61: v42.15,19.65 42.19,19.68 42.4,19.68 45.96,16.13 v45.96,14.86 v45.95,14.85 44.27,13.18 38.84,7.75 36.94,7.75 35.78,8.9 R27.2
  Top 0.813: R27.2 35.41,8.6 31.65,8.6 30.3,9.95 | 19.1,8.75 17.57,10.28 17.57,14.43 v17.5,14.5
  Top 1.016: v15.85,16.3 16.1,16.55 16.1,19.15 | C15.1 24.41,9.36 | 24.86,9.8 24.41,9.36 | 24.41,9.36 24.08,9.02 23.79,9.02 23.52,8.75 19.1,8.75
  Top 1.27: 24.39,12.36 L3.P$1
  Bottom 0.203: C7.1 43.91,20.38
  Bottom 0.254: U$12.4 45.6,15.2 v45.95,14.85 | v32.75,48.55 32.75,53.25 31.3,54.7 29.65,54.7 v28.6,53.65
  Bottom 0.305: v38,28.65 38,32.5 36.15,34.35 v33.46,34.35 v33.45,34.36 | v29.6,38.65 29.6,45.1 v28.7,46
  Bottom 1.016: v15.85,16.3 17.5,14.65 v17.5,14.5
  pour Bottom (no thermals): 42.66,18.04 42.68,18.02 42.68,16.63 43.37,16.63 43.37,17.67 43.39,17.69 43.41,17.71 43.43,17.73 44.37,17.73 44.37,20.92 41.58,20.92 41.58,18.83 41.56,18.81 41.54,18.79 41.52,18.77 40.48,18.77 40.48,18.08 42.62,18.08 42.64,18.06
  pour Top (no thermals): 23.74,8.75 30.95,8.75 30.95,10.41 28.21,13.15 23.35,13.15 23.35,9.14
  pour Top (no thermals): 16.16,19.98 15.92,19.74 15.88,19.72 15.48,19.72 15.48,18.33 16.67,18.33 16.67,20.22 16.18,20.22 16.18,20.02
VBAT_IN  (via drill 0.35)
  Top 0.508: v32.15,24 27.6,24 v23.05,28.55 | v32.2,34.45 32.2,36.35 34.45,38.6 35.9,38.6 40.81,33.69 R11.2
  Top 1.27: C49.1 10.72,15.45 B1.2 v3.6,11.9
  Bottom 0.305: IC1.3
  Bottom 0.406: 25.35,19 IC1.12 21.23,19.01 19.27,17.05
  Bottom 0.508: v32.15,24 30.35,24 25.35,19 25.34,19.01 IC1.12 | v23.05,28.55 28.95,34.45 v32.2,34.45 | IC1.12 21.22,19 19.27,17.05 IC1.2
  Bottom 1.27: IC1.2 17.8,16.5 19.7,14.6 JP1.1 20.92,13.98 22.25,12.65 22.25,8.69 20.18,6.61 19.96,6.61 19.71,6.36 10.31,6.36 9.35,5.4 7.2,5.4 6.2,6.4 5.3,6.4 3.6,8.1 v3.6,11.9
  pour Bottom (no thermals): 17.28,16.38 18.17,16.38 18.17,17.72 17.28,17.72
VBAT_MEASURE
  Top 0.203: U$57.22-A8/CTX1 R12.2 43.17,34.91 43.17,33.12 R11.1
VBUS  (via drill 0.3, 0.35)
  Top 0.305: 17.28,21.73 U16.P$4 16.44,21.5 U16.P$3 | 13.98,24.12 U16.P$9 | v41.55,56.57 44,59.01 44,64.8 36.08,72.71 36.08,75.49 35.35,76.22 33.38,76.22 | U16.P$17 U16.P$18 | DONE.A 32.86,75.71 33.38,76.22 | 33.38,76.22 30.97,76.22 30.25,75.5 29.95,75.45 28.8,75.45 28.47,75.12 CHRG.A | 24.88,5.6 24.88,5.1 CN4.VBUS
  Top 0.406: v17.7,22.15 17.28,21.73 17.05,21.5 | 13.98,24.12 v13.6,24.5 13.6,33.85 12.56,34.89 12.56,46.84 16.72,51 20.5,51 21.55,49.95 v41.45,49.95
  Top 0.61: v17.7,22.15 17.05,21.5 16.44,21.5 | v11.6,10.5 11.6,8.45 13.2,6.85 24.35,6.85 24.9,6.3 24.9,5.95 24.88,5.93 24.88,5.6
  Top 1.016: v17.7,22.15 17.74,22.19 R119.2
  Bottom 0.305: v41.55,56.57 R13.1
  Bottom 0.406: v41.55,56.57 41.55,50.05 v41.45,49.95
  Bottom 0.61: v17.7,22.15 15.95,22.15 v13.6,24.5 | v13.6,24.5 14.5,23.6 v14.5,18.1 14.5,16.64 C17.1 | v11.6,10.5 11.6,13.5 11.05,14.05 11.05,23.9 11.65,24.5 v13.6,24.5
  pour Top (no thermals): 14.05,17.7 14.9,17.7 14.9,19.45 14.05,19.45
VMOTOR
  Bottom 0.381: U3.24 66.45,14.14 65.75,13.44 58.51,13.44
  Bottom 0.508: C11.1 55.37,11.54 Q2.2 58.51,13.44 59.44,14.37 59.44,17.42 U3.13
  pour Bottom (no thermals): 59.18,17.04 60.07,17.04 60.07,18.18 59.18,18.18
(copper drawn outside any net)
  shapes: Top area x1

## Text on the board
tPlace: IMU | PI_ENABLE / 5V / GND / RPI_TX / RPI_RX | + | GTernal / V1.1 | Battery / Manager | 5V Regulation
bPlace: Multiplexer | Power / Monitor | 6V Regulation | H-Bridge